# Altium PCB DC721E V1.0.PcbDoc (part 1 of 2)
Units mm, origin at the board's own origin, x right, y up, seen from the top; angles counter-clockwise.
Board outline 110.72 x 218.65 mm, 2 copper layers (Top Layer, Bottom Layer); 126 components, 58 nets, 282 pads, 418 vias.
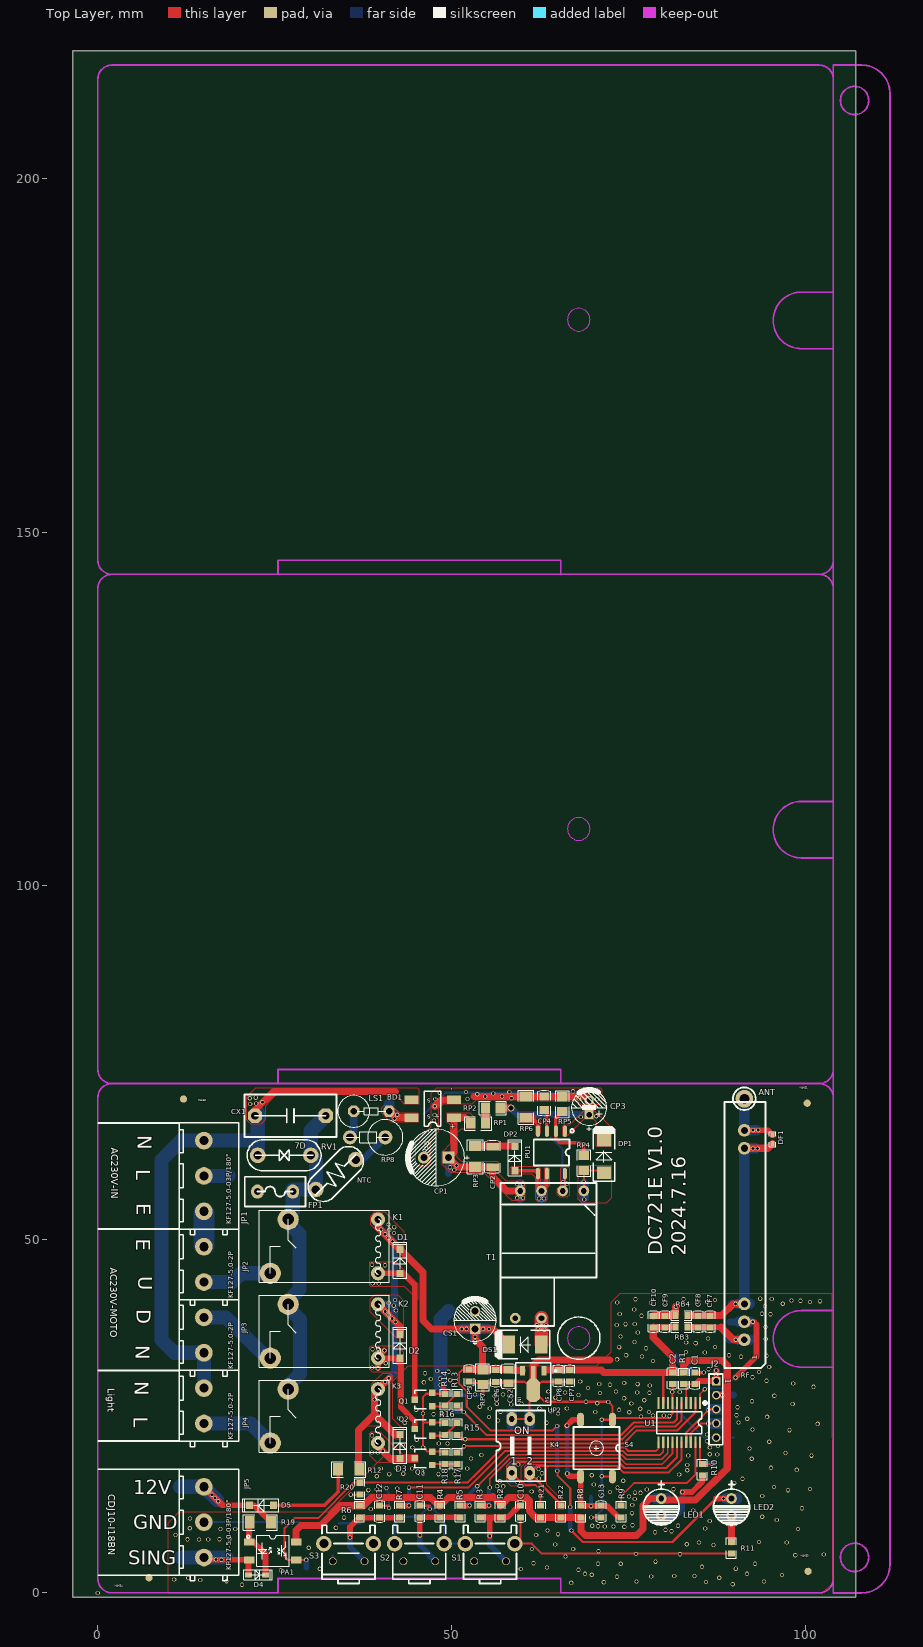
[diagram p0: Top Layer view]
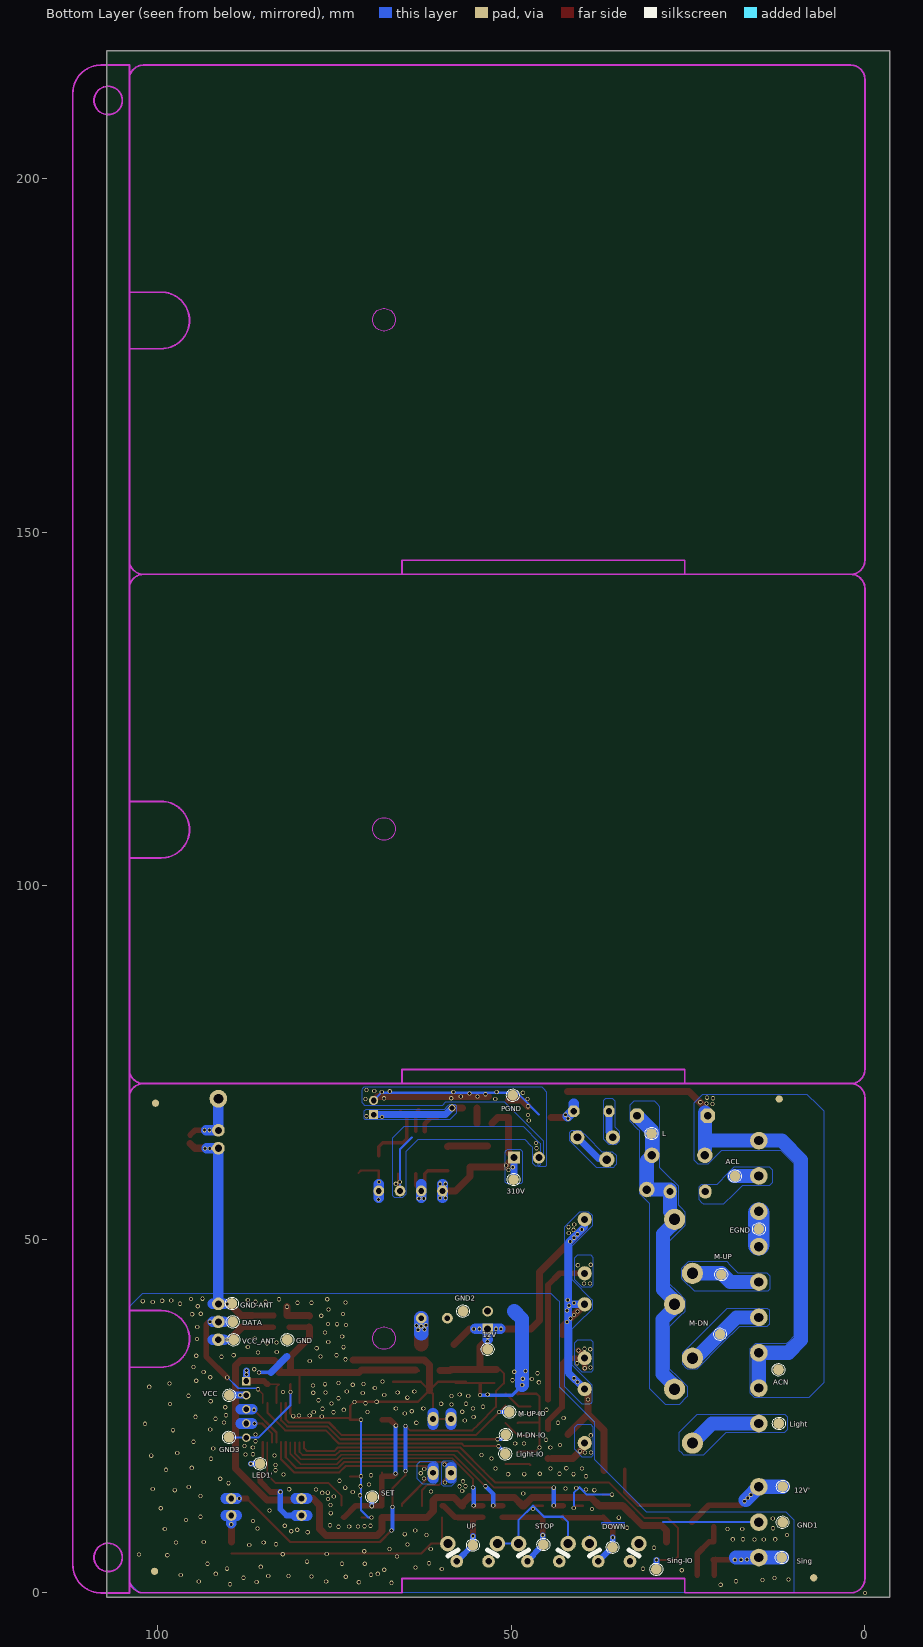
[diagram p1: Bottom Layer view, seen from below]

## Layer stack, top to bottom
Top Solder: solder mask 0.0102, Solder Resist, Dk 3.5
Top Layer: signal copper 0.0356
Dielectric1: core 0.32, FR-4, Dk 4.8
Bottom Layer: signal copper 0.0356
Bottom Solder: solder mask 0.0102, Solder Resist, Dk 3.5

## Board outline
-3.538,-0.61 107.181,-0.61 107.181,218.044 -3.538,218.044

## Design rules (kind name [scope] priority, off if disabled: settings)
AssemblyTestPointUsage [All] p0: scope1count=1 scope1_0_kind=Board scope1_0_value=Board scope2count=1 scope2_0_kind=Board scope2_0_value=Board commentlength=0
AssemblyTestpoint [All] p0: scope1count=1 scope1_0_kind=Board scope1_0_value=Board scope2count=1 scope2_0_kind=Board scope2_0_value=Board commentlength=0
Clearance [All] p0: scope1count=1 scope1_0_kind=Board scope1_0_value=Board scope2count=1 scope2_0_kind=Board scope2_0_value=Board commentlength=0 gap=0.2
Clearance POLY [All] p0: scope1count=1 scope1_0_kind=Board scope1_0_value=Board scope2count=1 scope2_0_kind=Board scope2_0_value=Board commentlength=0 gap=0.254
Clearance POLY [All] p1: gap=0.254 ignorepadtopadclearanceinfootprint=FALSE except(0: Arc-Hole Track-Hole SMDPad-Hole THPad-Hole Via-Hole Fill-Hole Poly-Hole Region-Hole Text-Hole)
Clearance [All] p2: gap=0.2 ignorepadtopadclearanceinfootprint=FALSE except(0: Arc-Hole Track-Hole SMDPad-Hole THPad-Hole Via-Hole Fill-Hole Poly-Hole Region-Hole Text-Hole)
ComponentClearance [All] p0: scope1count=1 scope1_0_kind=Board scope1_0_value=Board scope2count=1 scope2_0_kind=Board scope2_0_value=Board commentlength=0 gap=0.254 collisioncheckmode=3
DiffPairsRouting [All] p0: scope1count=1 scope1_0_kind=Board scope1_0_value=Board scope2count=1 scope2_0_kind=Board scope2_0_value=Board commentlength=0
FabricationTestPointUsage TestPointUsage [All] p0: scope1count=1 scope1_0_kind=Board scope1_0_value=Board scope2count=1 scope2_0_kind=Board scope2_0_value=Board commentlength=0 valid=0 allowmultiple=FALSE
FabricationTestPointUsage TestPointUsage [All] p1: valid=0 allowmultiple=FALSE
FabricationTestpoint Testpoint [All] p0: scope1count=1 scope1_0_kind=Board scope1_0_value=Board scope2count=1 scope2_0_kind=Board scope2_0_value=Board commentlength=0 side=3 testpointundercomponent=TRUE minsize=1.016 maxsize=2.54 preferedsize=1.524 minholesize=0 maxholesize=1.016 preferedholesize=0.813 testpointgrid=0.025
FabricationTestpoint Testpoint [All] p1: side=3 testpointundercomponent=TRUE minsize=1.016 maxsize=2.54 preferedsize=1.524 minholesize=0 maxholesize=1.016 preferedholesize=0.813 testpointgrid=0.025 allowsidetop=TRUE allowsidebottom=TRUE usegrid=TRUE gridtolerance=0
FanoutControl Fanout_BGA [All] p0 off: scope1count=1 scope1_0_kind=Board scope1_0_value=Board scope2count=1 scope2_0_kind=Board scope2_0_value=Board commentlength=69 // Protel DXP Scope 1 Expression Was: IsBGA   Fanout_BGA (Default Rule)
FanoutControl Fanout_LCC [All] p0 off: scope1count=1 scope1_0_kind=Board scope1_0_value=Board scope2count=1 scope2_0_kind=Board scope2_0_value=Board commentlength=69 // Protel DXP Scope 1 Expression Was: IsLCC   Fanout_LCC (Default Rule)
FanoutControl Fanout_SOIC [All] p0 off: scope1count=1 scope1_0_kind=Board scope1_0_value=Board scope2count=1 scope2_0_kind=Board scope2_0_value=Board commentlength=71 // Protel DXP Scope 1 Expression Was: IsSOIC   Fanout_SOIC (Default Rule)
FanoutControl Fanout_Small [All] p0 off: scope1count=1 scope1_0_kind=Board scope1_0_value=Board scope2count=1 scope2_0_kind=Board scope2_0_value=Board commentlength=84 // Protel DXP Scope 1 Expression Was: (CompPinCount < 5)   Fanout_Small (Default Rule)
FanoutControl Fanout_Default [All] p0: scope1count=1 scope1_0_kind=Board scope1_0_value=Board scope2count=1 scope2_0_kind=Board scope2_0_value=Board commentlength=30 // Fanout_Default (Default Rule)
FanoutControl Fanout_Small [All] p1 off: bgadir=Out bgaviamode=Centered fanoutstyle=Auto fanoutdirection=Alternating viagrid=0.025 // Protel DXP Scope 1 Expression Was: (CompPinCount < 5)   Fanout_Small (Default Rule)
FanoutControl Fanout_Default [All] p2: bgadir=Out bgaviamode=Centered fanoutstyle=Auto fanoutdirection=Alternating viagrid=0.025 // Fanout_Default (Default Rule)
FanoutControl Fanout_SOIC [All] p3 off: bgadir=Out bgaviamode=Centered fanoutstyle=Auto fanoutdirection=Alternating viagrid=0.025 // Protel DXP Scope 1 Expression Was: IsSOIC   Fanout_SOIC (Default Rule)
FanoutControl Fanout_BGA [All] p4 off: bgadir=Out bgaviamode=Centered fanoutstyle=Auto fanoutdirection=Alternating viagrid=0.025 // Protel DXP Scope 1 Expression Was: IsBGA   Fanout_BGA (Default Rule)
FanoutControl Fanout_LCC [All] p5 off: bgadir=Out bgaviamode=Centered fanoutstyle=Auto fanoutdirection=Alternating viagrid=0.025 // Protel DXP Scope 1 Expression Was: IsLCC   Fanout_LCC (Default Rule)
Height [All] p0: scope1count=1 scope1_0_kind=Board scope1_0_value=Board scope2count=1 scope2_0_kind=Board scope2_0_value=Board commentlength=0
HoleSize [All] p0: scope1count=1 scope1_0_kind=Board scope1_0_value=Board scope2count=1 scope2_0_kind=Board scope2_0_value=Board commentlength=0 absolutevalues=TRUE maxlimit=2.54 minlimit=0.025 maxpercent=80.000 minpercent=20.000
HoleToHoleClearance [All] p0: scope1count=1 scope1_0_kind=Board scope1_0_value=Board scope2count=1 scope2_0_kind=Board scope2_0_value=Board commentlength=0
LayerPairs [All] p0: scope1count=1 scope1_0_kind=Board scope1_0_value=Board scope2count=1 scope2_0_kind=Board scope2_0_value=Board commentlength=0 enforce=TRUE
MinimumSolderMaskSliver [All] p0: scope1count=1 scope1_0_kind=Board scope1_0_value=Board scope2count=1 scope2_0_kind=Board scope2_0_value=Board commentlength=0
NetAntennae [All] p0: scope1count=1 scope1_0_kind=Board scope1_0_value=Board scope2count=1 scope2_0_kind=Board scope2_0_value=Board commentlength=0
PasteMaskExpansion [All] p0: scope1count=1 scope1_0_kind=Board scope1_0_value=Board scope2count=1 scope2_0_kind=Board scope2_0_value=Board commentlength=0 expansion=0
PlaneClearance [All] p0: scope1count=1 scope1_0_kind=Board scope1_0_value=Board scope2count=1 scope2_0_kind=Board scope2_0_value=Board commentlength=0 clearance=0.508
PlaneConnect [All] p0: scope1count=1 scope1_0_kind=Board scope1_0_value=Board scope2count=1 scope2_0_kind=Board scope2_0_value=Board commentlength=0 planeconnectstyle=Direct reliefexpansion=0.508 reliefentries=4 reliefconductorwidth=0.254 reliefairgap=0.254
PlaneConnect [All] p1: planeconnectstyle=Direct reliefexpansion=0.508 reliefentries=4 reliefconductorwidth=0.254 reliefairgap=0.254
PolygonConnect PolygonConnect_1 [All] p0: scope1count=1 scope1_0_kind=Board scope1_0_value=Board scope2count=1 scope2_0_kind=Board scope2_0_value=Board commentlength=0 connectstyle=Direct reliefconductorwidth=0.5 reliefentries=4 polygonreliefangle="90 Angle"
PolygonConnect [All] p0 off: scope1count=1 scope1_0_kind=Board scope1_0_value=Board scope2count=1 scope2_0_kind=Board scope2_0_value=Board commentlength=44 connectstyle=Relief reliefconductorwidth=0.5 reliefentries=4 polygonreliefangle="90 Angle" // Protel DXP Scope 2 Expression Was: isvia
PolygonConnect PolygonConnect_1 [All] p1: connectstyle=Direct reliefconductorwidth=0.5 reliefentries=4 polygonreliefangle="90 Angle" airgapwidth=0.254
PolygonConnect [All vs isvia] p2: connectstyle=Relief reliefconductorwidth=0.5 reliefentries=4 polygonreliefangle="90 Angle" airgapwidth=0.254
RoutingCorners [All] p0: scope1count=1 scope1_0_kind=Board scope1_0_value=Board scope2count=1 scope2_0_kind=Board scope2_0_value=Board commentlength=0 cornerstyle=45-Degree minsetback=2.54 maxsetback=2.54
RoutingLayers [All] p0: scope1count=1 scope1_0_kind=Board scope1_0_value=Board scope2count=1 scope2_0_kind=Board scope2_0_value=Board commentlength=0 top layer=Horizontal bottom layer=Vertical
RoutingPriority [All] p0: scope1count=1 scope1_0_kind=Board scope1_0_value=Board scope2count=1 scope2_0_kind=Board scope2_0_value=Board commentlength=0
RoutingTopology [All] p0: scope1count=1 scope1_0_kind=Board scope1_0_value=Board scope2count=1 scope2_0_kind=Board scope2_0_value=Board commentlength=0 topology=Shortest
RoutingVias [All] p0: scope1count=1 scope1_0_kind=Board scope1_0_value=Board scope2count=1 scope2_0_kind=Board scope2_0_value=Board commentlength=0 holewidth=0.406 width=0.584 viastyle="Through Hole" minholewidth=0.254 minwidth=0.254 maxholewidth=0.711 maxwidth=1.27
RoutingVias [All] p1: holewidth=0.406 width=0.584 viastyle="Through Hole" minholewidth=0.254 minwidth=0.254 maxholewidth=0.711 maxwidth=1.27
ShortCircuit [All] p0: scope1count=1 scope1_0_kind=Board scope1_0_value=Board scope2count=1 scope2_0_kind=Board scope2_0_value=Board commentlength=0 allowed=FALSE
SilkToBoardRegionClearance [All] p0: scope1count=1 scope1_0_kind=Board scope1_0_value=Board scope2count=1 scope2_0_kind=Board scope2_0_value=Board commentlength=0
SilkToSilkClearance [All] p0: scope1count=1 scope1_0_kind=Board scope1_0_value=Board scope2count=1 scope2_0_kind=Board scope2_0_value=Board commentlength=0
SilkToSolderMaskClearance SilkscreenOverComponentPads [All] p0 off: scope1count=1 scope1_0_kind=Board scope1_0_value=Board scope2count=1 scope2_0_kind=Board scope2_0_value=Board commentlength=44 // Protel DXP Scope 1 Expression Was: IsPad
SilkToSolderMaskClearance SilkscreenOverComponentPads [IsPad] p1: minsilkscreentomaskgap=0.254 clearancetoexposedcopper=TRUE
SolderMaskExpansion [All] p0: scope1count=1 scope1_0_kind=Board scope1_0_value=Board scope2count=1 scope2_0_kind=Board scope2_0_value=Board commentlength=0 expansion=0.102
SolderMaskExpansion [All] p1: expansion=0.102 istentingtop=FALSE
UnRoutedNet [All] p0: scope1count=1 scope1_0_kind=Board scope1_0_value=Board scope2count=1 scope2_0_kind=Board scope2_0_value=Board commentlength=0
UnpouredPolygon [All] p0: scope1count=1 scope1_0_kind=Board scope1_0_value=Board scope2count=1 scope2_0_kind=Board scope2_0_value=Board commentlength=0
Width [All] p0: scope1count=1 scope1_0_kind=Board scope1_0_value=Board scope2count=1 scope2_0_kind=Board scope2_0_value=Board commentlength=0 maxlimit=10 minlimit=0.254 preferedwidth=0.254
Width [All] p1: maxlimit=10 minlimit=0.254 preferedwidth=0.254
21 further rules are at their usual default settings.

## Components (designator, comment, footprint, x,y, rotation, side; value= is the part's Value field where it differs from the comment)
12V "TEST_POINT" 测试点 53.34,34.442 r180 bottom
12V' "TEST_POINT" 测试点 11.608,15.037 r270 bottom
310V "TEST_POINT" 测试点 49.682,58.445 r270 bottom
ACL "TEST_POINT" 测试点 18.364,58.928 r270 bottom
ACN "TEST_POINT" 测试点 12.217,31.547 r270 bottom
ANT "天线" 天线焊盘 91.415,69.875 r0 top
BD1 "MB6S" 整流桥MB6S 47.371,68.453 r180 top
C1 "0.1uF" C0603 84.43,30.328 r90 top
C2 "0.1uF" C0603 81.229,30.328 r90 top
C10 "10nF" C0603 59.781,11.5 r270 top
C11 "10nF" C0603 45.55,11.5 r90 top
C12 "10nF" C0603 39.858,11.5 r90 top
C13 "10nF" C0603 71.165,11.5 r270 top
CF7 "10nF" C0603 86.589,38.354 r90 top
CF8 "0.1uF" C0603 84.887,38.354 r90 top
CF9 "10nF" C0603 80.188,38.354 r90 top
CF10 "0.1uF" C0603 78.537,38.354 r90 top
CP1 "4.7uF/450V" RB8 47.854,61.544 r180 top
CP2 "1000V-1nF" C1206 55.829,61.646 r90 top
CP3 "50V-4.7uF" RB5 69.469,68.631 r90 top
CP4 "0805-50V-22nF" C0805 63.119,69.24 r90 top
CP5 "4.7uF 16V" C0603 52.502,30.734 r270 top
CP6 "0.1uF" C0603 56.261,30.658 r270 top
CP7 "0.1uF" C0603 66.726,30.683 r270 top
CP8 "22uF" C0603 65.1,30.683 r270 top
CS1 "100uF/35V" RB6-2.5MM 53.34,38.583 r90 top
CS2 "0805-0.1uF" C0805 58.09,30.607 r270 top
CX1 "X2 0.22uF" "电容X2  220nF/275V  13*6 P=10" 27.229,67.462 r180 top
D1 "1N4007W" SOD-123FL(A7) 42.748,46.888 r90 top
D2 "1N4007W" SOD-123FL(A7) 42.748,34.874 r90 top
D3 "1N4007W" SOD-123FL(A7) 42.748,20.726 r90 top
D4 "1N4148" SOD323 22.504,2.54 r180 top
D5 "1N4007W" SOD-123FL(A7) 23.165,12.395 r180 top
DATA "TEST_POINT" 测试点 89.383,38.329 r270 bottom
DF1 "ESD112-B1-02EL" R0402 95.402,64.135 r90 top
DOWN "TEST_POINT" 测试点 35.687,6.452 r270 bottom
DP1 "RS1M" SMA 71.577,61.697 r90 top
DP2 "1N4007W" SOD-123FL(A7) 58.979,61.392 r90 top
DS1 "SK310B" SMB 60.401,35.128 r180 top
EGND "TEST_POINT" 测试点 14.986,51.46 r270 bottom
FP1 "T10A 250V" 保险丝-方形,8*4mm 25.07,56.744 r0 top
GND "TEST_POINT" 测试点 81.661,35.789 r270 bottom
GND1 "TEST_POINT" 测试点 11.633,9.982 r270 bottom
GND2 "TEST_POINT" 测试点 56.82,39.833 r270 bottom
GND3 "TEST_POINT" 测试点 89.916,21.996 r270 bottom
GND-ANT "TEST_POINT" 测试点 89.51,40.919 r270 bottom
J2 "烧录口" 调试烧录口2.0*5 87.452,25.959 r270 top
JP1 "KF127-5.0-03P-1G/180°" "接插件 KF127-5.0-03P-1G/180°" 15,58.952 r90 top
JP2 "HDR254MS-1X2-180°" "接插件 KF127-5.0-02P-1G/180°" 15,46.452 r90 top
JP3 "HDR254MS-1X2-180°" "接插件 KF127-5.0-02P-1G/180°" 15,36.452 r90 top
JP4 "HDR254MS-1X2-180°" "接插件 KF127-5.0-02P-1G/180°" 15,26.452 r90 top
JP5 "KF127-5.0-03P-1G/180°" "接插件 KF127-5.0-03P-1G/180°" 15,10 r90 top
K1 "HF32F/012-HSLQ" 继电器HF32FA-G/H 32,49 r180 top
K2 "HF32F/012-HSLQ" 继电器HF32FA-G/H 32,37 r180 top
K3 "HF32F/012-HSLQ" 继电器HF32FA-G/H 32,25 r180 top
K4 "KF-1001-02" "拨码开关 KF-1001-02" 59.792,20.777 r0 top
L "TEST_POINT" 测试点 30.175,64.948 r270 bottom
LED1 "@3-绿色" LED,3mm 79.664,12.141 r270 top
LED1' "TEST_POINT" 测试点 85.522,18.263 r270 bottom
LED2 "@3-红色" LED,3mm 89.6,12.141 r270 top
Light "TEST_POINT" 测试点 12.167,23.952 r270 bottom
Light-IO "TEST_POINT" 测试点 50.851,19.66 r270 bottom
LS1 "色码电感 0510-102KT 1mH 1W" 电阻1W立式 38.684,68.097 r0 top
M-DN "TEST_POINT" 测试点 20.472,36.576 r270 bottom
M-DN-IO "TEST_POINT" 测试点 50.775,22.377 r270 bottom
M-UP "TEST_POINT" 测试点 20.32,45.009 r270 bottom
M-UP-IO "TEST_POINT" 测试点 50.292,25.578 r270 bottom
MAKE1 "" MK点 100.305,69.24 r90 top
MAKE2 "" MK点 12.116,69.825 r90 top
MAKE3 "" MK点 100.432,3.048 r90 top
MAKE4 "" MK点 7.239,2.134 r90 top
NTC "热敏电阻 NTC-5D09" 电阻热敏NTC5D09 33.655,59.157 r45 top
PA1 "EL357N" 光藉P181 24.74,5.944 r0 top
PGND "TEST_POINT" 测试点 49.784,70.358 r270 bottom
PU1 "ME8321" SOP-7 64.135,62.281 r270 top
Q1 "8050" SOT-23-8050 46.05,27.33 r90 top
Q2 "8050" SOT-23-8050 46.05,23.177 r90 top
Q3 "8050" SOT-23-8050 46.05,19.025 r90 top
R1 "10K" R0603 82.818,30.328 r270 top
R2 "47K" R0603 56.923,11.5 r270 top
R3 "2K" R0603 54.077,11.5 r270 top
R4 "47K" R0603 48.385,11.5 r270 top
R5 "2K" R0603 51.231,11.5 r270 top
R6 "47K" R0603 37,11.5 r270 top
R7 "2K" R0603 42.692,11.5 r270 top
R8 "47K" R0603 68.308,11.5 r90 top
R9 "2K" R0603 74,11.5 r270 top
R10 "2K" R0603 85.471,17.424 r90 top
R11 "10K" R0603 89.586,6.375 r270 top
R12 "1206-100R" R1206 35.484,17.475 r180 top
R13 "2K" R0603 50.8,27.33 r270 top
R14 "47K" R0603 49.098,27.33 r90 top
R15 "2K" R0603 50.8,23.177 r270 top
R16 "47K" R0603 49.098,23.177 r90 top
R17 "2K" R0603 50.8,19.025 r90 top
R18 "47K" R0603 49.098,19.025 r90 top
R19 "10K" R1206 22.987,9.982 r0 top
R20 "47K" R0603 37.059,14.707 r270 top
R21 "47K" R0603 62.615,11.5 r90 top
R22 "47K" R0603 65.462,11.5 r270 top
RB3 "0603-80R/100MHz" R0603 82.525,37.567 r0 top
RB4 "0603-80R/100MHz" R0603 82.525,39.218 r0 top
RF "HT1270-RF 3.3V 433MHz A/04" 接收模块 91.415,35.789 r270 top
RP1 "0805-1.8M" R0805 53.772,66.396 r180 top
RP2 "0805-1.8M" R0805 55.855,68.555 r180 top
RP3 "1206-150K" R1206 53.365,61.697 r270 top
RP4 "0805-24K" R0805 68.732,60.782 r270 top
RP5 "0805-3.3K" R0805 65.684,69.113 r270 top
RP6 "1206-4.3R" R1206 60.528,68.682 r270 top
RP7 "0805-3.3K" R0805 54.407,30.505 r90 top
RP8 "0.39R 5% 2WS" 电阻2W立式 38.151,64.414 r180 top
RV1 "JVR10N511K87PRM" "电阻压敏 P=7.5 RI" 26.365,61.874 r0 top
S1 "TSZJ6643" 按键TSZJ6643(DC43盒) 55.46,5.617 r0 top
S2 "TSZJ6643" 按键TSZJ6643(DC43盒) 45.46,5.617 r0 top
S3 "TSZJ6643" 按键TSZJ6643(DC43盒) 35.46,5.617 r0 top
S4 "TSTP6650K" "按键 TSTP6650" 70.51,20.472 r270 top
SET "TEST_POINT" 测试点 69.672,13.564 r270 bottom
Sing "TEST_POINT" 测试点 11.76,5.004 r270 bottom
Sing-IO "TEST_POINT" 测试点 29.489,3.327 r0 bottom
STOP "TEST_POINT" 测试点 45.466,6.833 r270 bottom
T1 "DC1140-T" "变压器EPC13 加宽" 59.03,38.837 r270 top
U1 "HC32F002C4P" TSSOP20-0.65 82.22,24.079 r270 top
UP "TEST_POINT" 测试点 55.423,6.754 r180 bottom
UP2 "LR78L05U" 78L05 61.57,31.191 r180 top
VCC "TEST_POINT" 测试点 89.865,27.94 r270 bottom
VCC_ANT "TEST_POINT" 测试点 89.256,35.789 r270 bottom

## Footprints (in the part's own frame and the unit in brackets; to place one, negate y for a bottom-side part, rotate by r counter-clockwise, add the part's x,y. Pads: shape width x height; smd on the part's side, far side on the other; paste and mask are expansions set on the pad)
78L05 [mm]
  rect 0.7x1.35 smd: 1(1.5,-0.225) 3(-1.5,-0.225)
  oct 1.9x3.3 smd: 2(0,2.55)
  rect 0.7x1.8 smd: 2(0,0)
  silkscreen extent -3.28,-1.35 2.5,4.65
C0603 [mm]
  rect 0.85x1 smd: 1(-0.825,0) 2(0.825,0)
  silkscreen extent -1.5,-0.7 1.5,0.7
C0805 [mm]
  rect 1.1x1.4 smd: 1(-0.95,0) 2(0.95,0)
  silkscreen extent -1.75,-0.95 1.75,0.95
C1206 [mm]
  rect 1.1x1.8 smd: 1(-1.45,0) 2(1.45,0)
  silkscreen extent -2.3,-1.1 2.3,1.1
LED,3mm [mm]
  round 1.524 hole 0.8: 1(-1.2,0) 2(1.2,0)
  silkscreen extent -3.69,-2.55 2.55,2.55
MK点 [mil]
  round 40 smd: ""(0,0)
  round 40 smd far side: ""(0,0)
R0402 [mm]
  rect 0.7x0.6 smd: 1(-0.6,0) 2(0.6,0)
  silkscreen extent -1.05,-0.45 1.05,0.45
R0603 [mm]
  rect 0.85x1 smd: 1(-0.825,0) 2(0.825,0)
  silkscreen extent -1.45,-0.7 1.45,0.7
R0805 [mm]
  rect 1.3x1.5 smd: 1(-1.05,0) 2(1.05,0)
  silkscreen extent -1.9,-0.95 1.9,0.95
R1206 [mm]
  rect 1.4x1.8 smd: 1(-1.5,0) 2(1.5,0)
  silkscreen extent -2.4,-1.1 2.4,1.1
RB5 [mm]
  rect 1.3x1.3 hole 0.8: 1(-1,0)
  round 1.3 hole 0.8: 2(1,0)
  silkscreen extent -3.3,-2.5 2.5,2.5
RB6-2.5MM [mm]
  rect 1.5x1.5 hole 1: 1(-1.25,0)
  round 1.5 hole 1: 2(1.25,0)
  silkscreen extent -3.51,-3 3,3
RB8 [mm]
  rect 1.7x1.7 hole 1: 1(-1.75,0)
  round 1.7 hole 1: 2(1.75,0)
  silkscreen extent -4.65,-4 4,4
SMA [mm]
  rect 1.8x2 smd: 1(-2.3,0) 2(2.3,0)
  silkscreen extent -3.5,-1.5 4.19,1.5
SMB [mm]
  rect 1.8x2.5 smd: 1(-2.3,0) 2(2.3,0)
  silkscreen extent -3.5,-2 4.19,2
SOD323 [mm]
  rect 1x0.7 smd: 1(1.2,0) 2(-1.2,0)
  silkscreen extent -2.16,-0.7 1.91,0.7
SOD-123FL(A7) [mm]
  rect 1x1 smd: 1(-1.7,0) 2(1.7,0)
  silkscreen extent -2.4,-0.95 2.7,0.95
SOP-7 [mm]
  oval 1.598x0.6 smd: 1(-3,1.905) 2(-3,0.635) 3(-3,-0.635) 4(-3,-1.905) 5(3,-1.905) 6(3,-0.635) 8(3,1.905)
  silkscreen extent -3.3,-2.5 1.85,3.17
SOT-23-8050 [mm]
  rect 0.9x0.95 smd: 1(0,1.25) 2(0.95,-1.25) 3(-0.95,-1.25)
  silkscreen extent -1.3,-0.38 1.3,1.25
TSSOP20-0.65 [mm]
  rect 1.65x0.3 smd: 1(-2.775,2.925) 2(-2.775,2.275) 3(-2.775,1.625) 4(-2.775,0.975) 5(-2.775,0.325) 6(-2.775,-0.325) 7(-2.775,-0.975) 8(-2.775,-1.625) 9(-2.775,-2.275) 10(-2.775,-2.925) 11(2.775,-2.925) 12(2.775,-2.275) 13(2.775,-1.625) 14(2.775,-0.975) 15(2.775,-0.325) 16(2.775,0.325) 17(2.775,0.975) 18(2.775,1.625) 19(2.775,2.275) 20(2.775,2.925)
  silkscreen extent -2.97,-3.2 1.55,3.82
保险丝-方形,8*4mm [mm]
  oval 1.8x2 hole 1: 1(-2.5,0) 2(2.5,0)
  silkscreen extent -4.3,-2.1 4.3,2.1
光藉P181 [mm]
  rect 1.5x1 smd: 1(-3.3,1.27) 2(-3.3,-1.27) 3(3.3,-1.27) 4(3.3,1.27)
  silkscreen extent -3.65,-2.2 2.3,2.21
"变压器EPC13 加宽" [mm]
  round 1.524 hole 0.8: 1(-18,9.7) 2(-18,6.7) 3(-18,3.7) 4(-18,0.7) 5(0,0) 6(0,3.7)
  silkscreen extent -19.1,-2.12 1.14,11.5
天线焊盘 [mm]
  round 2.5 hole 1.4: 1(0,0)
  silkscreen extent -1.6,-1.6 1.6,1.6
"拨码开关 KF-1001-02" [mm]
  oct 1.5x2 hole 0.8: 1(-1.27,-3.81)
  oval 1.5x2 hole 0.8: 2(1.27,-3.81) 3(1.27,3.81) 4(-1.27,3.81)
  silkscreen extent -3.46,-5 3.46,5
"按键 TSTP6650" [mm]
  oval 2x1 smd: 1(-4,2.25) 2(-4,-2.25) 3(4,-2.25) 4(4,2.25)
  silkscreen extent -3,-3.25 3,3.25
按键TSZJ6643(DC43盒) [mm]
  round 2.2 hole 1.3: 1(-3.5,1.35) 2(3.5,1.35)
  round 1.1 / inner round 1.8 / far side round 1.8 hole 0.9: 3(2.25,-1.15) 4(-2.25,-1.15)
  silkscreen extent -3.75,-4.3 3.75,3.95
"接插件 KF127-5.0-02P-1G/180°" [mm]
  round 2.5 hole 1.3: 1(-2.5,0) 2(2.5,0)
  silkscreen extent -5.8,-4.9 5,3.5
"接插件 KF127-5.0-03P-1G/180°" [mm]
  round 2.5 hole 1.3: 1(-5,0) 2(0,0) 3(5,0)
  silkscreen extent -8.3,-4.9 7.5,3.5
接收模块 [mm]
  round 1.8 hole 0.9: 1(0,0)
  round 1.8 hole 1: 2(-2.54,0) 3(-5.08,0) 4(-27.08,0) 5(-29.62,0)
  silkscreen extent -33.62,-2.8 4,3
整流桥MB6S [mm]
  rect 2x1.2 smd: 1(-3,1.25) 2(-3,-1.25) 3(3,1.25) 4(3,-1.25)
  silkscreen extent -1.14,-2.49 1.19,2.51
测试点 [mm]
  round 1.5 smd: 1(0,0)
  silkscreen extent -0.9,-0.9 0.9,0.9
"电容X2  220nF/275V  13*6 P=10" [mm]
  oct 2x2 hole 1.1: 1(-5,0) 2(5,0)
  silkscreen extent -6.5,-3 6.5,3
电阻1W立式 [mm]
  oct 1.6x1.6 hole 0.9: 1(-2.5,0) 2(2.5,0)
  silkscreen extent -4.75,-2.25 2,2.25
电阻2W立式 [mm]
  round 2 hole 1.1: 1(-2.5,0) 2(2.5,0)
  silkscreen extent -5,-2.5 3,2.5
"电阻压敏 P=7.5 RI" [mm]
  round 2.2 hole 1.2: 1(3.75,0) 2(-3.75,0)
  silkscreen extent -5.24,-2.2 5.2,2.2
电阻热敏NTC5D09 [mm]
  round 2.2 hole 1.2: 1(-3.5,0.5) 2(3.499,-0.5)
  silkscreen extent -4.59,-2 4.69,2.1
继电器HF32FA-G/H [mm]
  round 3 hole 1.6: 1(7.62,3.81) 2(5.08,-3.81)
  round 2 hole 1: 3(-7.62,-3.81) 4(-7.62,3.81)
  silkscreen extent -9.2,-5.1 9.2,5.1
调试烧录口2.0*5 [mm]
  rect 1.2x1.2 hole 0.8: 1(-4,0)
  round 1.2 hole 0.8: 2(-2,0) 3(0,0) 4(2,0) 5(4,0)
  silkscreen extent -5,-1.04 5.01,0.9

## Part data
12V ANT DATA GND-ANT MAKE1 MAKE2 MAKE3 MAKE4 VCC: library part Antenna, "Generic Antenna"
C1 C2 C10 C11 C12 C13 CF7 CF8 CF9 CF10 CP2 CP4 CP5 CP6 CP7 CP8 CS2 CX1: library part CAP, "Capacitor"
CP1 CP3 CS1: library part ELECTRO1, "Electrolytic Capacitor"
D1 D3 D4 D5 DP1 DP2 DS1: library part DIODE, "Diode"
D2: library part 二极管
DF1: library part TVS_PESDNC3D5VB, "TVS管 PESDNC3D5VU/SOD-323"
FP1: library part "Fuse 2", "Fuse"
J2: library part "Header 5", "Header, 5-Pin"
JP1 JP5: library part "Header 3", "Header, 3-Pin"
JP2 JP3 JP4: "接插件 1*2/2.5mm/180"
K1 K2 K3: library part Relay-SPST, "Single-Pole Single-Throw Relay"
K4: library part 拨码开关-2P
LED1 LED2: library part LED2, "Typical RED, GREEN, YELLOW, AMBER GaAs LED"
LS1: library part Inductor, "Inductor"
NTC RV1: library part VARISTOR
PA1: library part Optoisolator1, "4-Pin Phototransistor Optocoupler"
R1 R2 R3 R4 R5 R6 R7 R8 R9 R10 R11 R12 R13 R14 R15 R16 R17 R18 R19 R20 R21 R22 RB3 RB4 RP1 RP2 RP3 RP4 RP5 RP6 RP7 RP8: library part 电阻
RF: library part WIRELESS_RM
S1 S2 S3 S4: library part "按键 4脚"
T1: library part 变压器3绕组6脚
U1: library part "华大HC32L110 C6PA 20TSSOP"
UP2: library part 78L05

## Via types
v1: diameter 0.6, hole 0.4, Top Layer to Bottom Layer, tented both sides, 417 vias
v2: diameter 1, hole 0.7, Top Layer to Bottom Layer, tented both sides, 1 vias

## Nets (pads, with @x,y where several pads share a name; then routed paths per layer and width w, separated by ;. In a path a pad name is that pad's centre, name@x,y a point inside that pad or via, vN(x,y) a via of type N, cw(c..) or ccw(c..) an arc to the next point about the centre after c; other vN are vias at no path point)
12V: 12V'.1 D5.2 JP5.3 R19.2 | length 17.5
  Top Layer w0.8: 17.42,12.58 17.605,12.395 D5.2@21.465,12.395 22.074,12.395 R19.2@24.487,9.982
  Top Layer w1: JP5.3@15,15 v1(16.574,13.426) 17.42,12.58
  Bottom Layer w2: 12V'.1@11.645,15 JP5.3@15,15 v1(16.574,13.426) v1@16.843,13.157
  other v1: 17.033,12.967 16.128,13.872
12V/250MA: 12V.1 CP5.1 CP6.1 CS1.1 CS2.1 D1.2 D2.2 D3.2 DS1.2 K1.3 K2.3 K3.3 LED2.1 R12.1 RP7.2 UP2.1 | length 169
  Top Layer w0.3: CP5.1@52.095,31.559 51.574,31.559 51.054,31.039 51.054,29.642 52.172,28.524 52.172,26.314 54.686,23.8 ; 54.441,24.045 54.686,23.8 ; v1(64.948,23.597) 64.338,22.987 55.499,22.987 54.686,23.8 ; v1(64.973,17.221) 64.973,16.612 66.802,14.783 v1(66.802,12.141) ; v1(66.954,8.814) 68.57,7.199 81.265,7.199 87.408,13.341
  Top Layer w0.8: 87.408,13.341 LED2.1@89.6,13.341
  Top Layer w1: R12.1@36.881,17.296 36.881,23.005 39.144,25.269 ; K3.3@39.144,28.81 v1(39.144,27.356) 39.144,25.269 ; K1.3@39.144,52.81 K1.3@39.62,52.334 ; K3.3@39.62,28.81 v1(41.148,30.338) ; K2.3@39.62,40.81 42.748,37.682 D2.2@42.748,36.574 ; K1.3@39.62,52.81 K1.3@39.62,52.334 ; 41.986,22.426 39.144,25.269 ; 48.489,37.338 50.47,37.336 ; CP5.1@52.095,31.559 RP7.2@54.417,31.559 ; DS1.2@58.101,35.128 55.897,37.333 v1(54.483,37.333) CS1.1@53.34,37.333 ; UP2.1@60.07,31.416 58.674,31.416 58.531,31.559 RP7.2@54.417,31.559 ; K1.3@39.62,52.334 39.62,51.717 D1.2@42.748,48.588 45.999,45.337 45.999,38.532 47.195,37.336 50.47,37.336 ; 50.47,37.336 v1(51.455,37.333) v1(52.146,37.333) CS1.1@53.34,37.333 ; CS1.1@53.34,37.333 v1(53.34,36.22) 53.34,35.89 54.417,34.813 RP7.2@54.417,31.559
  Bottom Layer w0.3: v1(64.948,23.597) v1@64.973,23.571
  Bottom Layer w0.6: v1(64.973,17.221) v1@64.973,23.571 ; v1(66.802,12.141) 66.802,8.966 v1(66.954,8.814)
  Bottom Layer w1: K3.3@39.62,28.81 41.935,31.125 v1@41.935,40.818 ; K2.3@39.62,40.81 41.928,40.81 v1@41.935,40.818 ; K1.3@39.62,52.81 39.62,51.82 41.935,49.505 v1@41.935,40.818
  Bottom Layer w1.5: v1@51.557,37.333 v1(52.146,37.333) CS1.1@53.34,37.333 ; v1@53.34,35.839 v1(53.34,36.22) CS1.1@53.34,37.333 ; v1@55.062,37.333 v1(54.483,37.333) CS1.1@53.34,37.333 ; 88.827,13.341 90.387,13.341
  other v1: 88.468,13.36 40.621,29.811 53.365,35.56 55.296,37.313 42.109,38.321 41.62,38.81 41.142,39.288 40.64,39.79 42.139,39.929 41.834,40.615 41.148,40.996 42.012,41.427 41.664,49.672 41.123,50.213 40.625,50.712 41.885,50.902 41.199,51.333 40.03,51.384 41.91,51.714 41.097,52.095
ACL: ACL.1 FP1.1 JP1.2 | length 3.5
  Bottom Layer w2: JP1.2@15,58.952 ACL.1@18.467,58.952
ACN: ACN.1 BD1.4 CX1.2 JP1.3 JP3.1 JP4.2 RV1.2 | length 78.1
  Top Layer w1: CX1.2@22.229,68.275 24.87,70.917 42.062,70.917
  Bottom Layer w2: JP4.2@15,28.952 JP3.1@15,33.952 10.828,33.952 9.017,35.763 9.017,61.214 11.755,63.952 JP1.3@15,63.952 22.508,63.952 22.615,64.059 ; RV1.2@22.615,62.687 22.615,64.059 ; CX1.2@22.615,67.889 22.615,64.059
  other v1: 21.539,69.113 22.403,69.215 23.266,69.367 21.488,69.952 22.327,70.028
DATA: DATA.1 RF.2 U1.1 | length 21.5
  Top Layer w0.254: U1.1@85.145,26.854 85.145,28.122 v1(85.827,28.804)
  Top Layer w0.8: v1(90.17,30.455) 93.142,33.426 93.142,37.948 92.761,38.329 RF.2@91.415,38.329
  Bottom Layer w0.254: v1(85.827,28.804) 85.963,28.94 88.604,28.94 90.119,30.455 v1(90.17,30.455)
  Bottom Layer w1: DATA.1@89.383,38.329 RF.2@91.415,38.329
  Bottom Layer w1.5: RF.2@90.627,38.329 RF.2@92.188,38.329
  other v1: 92.608,38.329
DOWN: R7.1 U1.12 | length 43.7
  Top Layer w0.254: v1@43.973,12.325 v1(43.993,12.344) ; v1(43.993,14.884) 52.393,14.884 57.556,20.048 74.273,20.048 74.812,19.51 79.515,19.51 79.945,19.94 U1.12@79.945,21.304
  Top Layer w0.8: R7.1@42.692,12.325 v1@43.973,12.325
  Bottom Layer w0.6: v1(43.993,12.344) v1(43.993,14.884)
EGND: EGND.1 JP1.1 JP2.2 | length 4.5
  Bottom Layer w3: JP2.2@15,49.206 JP1.1@15,53.696
GND: C1.2 C2.1 C10.2 C11.2 C12.2 C13.2 CF9.2 CF10.2 CP5.2 CP6.2 CP7.2 CP8.2 CS1.2 CS2.2 GND1.1 GND2.1 GND3.1 GND.1 J2.5 JP5.2 K4.3 K4.4 Q1.2 Q2.2 Q3.2 R11.2 R14.2 R16.2 R18.2 R20.2 RB4.1 RP7.1 S1.1 S1.2 S1.4 S2.1 S2.2 S2.4 S3.1 S3.2 S3.4 S4.1 S4.4 T1.5 U1.7 UP2.2 | length 233.6
  Top Layer w0.3: v1(35.763,13.894) 35.775,13.882 R20.2@37.059,13.882 ; C12.2@39.858,12.325 41.129,12.325 41.148,12.344 ; C11.2@45.55,12.325 46.92,12.325 46.939,12.344 ; R18.2@49.098,19.85 48.973,19.975 Q3.2@47.3,19.975 46.599,19.975 v1(45.999,20.574) 45.999,24.079 ; R16.2@49.098,24.002 49.021,24.079 45.999,24.079 ; R14.2@49.098,28.155 46.443,28.155 45.999,27.711 45.999,24.079 ; CP5.2@52.347,29.657 CS2.2@57.861,29.657 ; CP6.2@56.439,29.858 58.064,29.858 60.353,29.858 UP2.2@61.57,28.641 ; K4.4@58.522,24.587 K4.3@61.062,24.587 ; C10.2@59.781,10.675 59.781,7.788 S1.2@58.96,6.967 61.359,6.967 62.776,5.55 R11.2@89.586,5.55 ; K4.3@61.57,25.095 K4.3@61.062,24.587 ; CP7.2@66.726,29.858 CP8.2@65.1,29.858 62.787,29.858 UP2.2@61.57,28.641 ; v1(69.774,10.668) 69.781,10.675 C13.2@71.165,10.675 ; v1(71.247,16.485) 72.748,16.485 S4.4@72.76,16.472 ; v1(71.247,24.486) 72.747,24.486 S4.1@72.76,24.472 ; C2.1@81.229,29.503 81.245,29.487 U1.7@81.245,26.854 81.245,25.339 80.62,24.714 73.002,24.714 S4.1@72.76,24.472 ; K4.3@61.062,24.587 61.062,28.133 UP2.2@61.57,28.641 ; UP2.2@61.57,28.641 63.185,27.026 72.187,27.026 72.76,26.452 S4.1@72.76,24.472
  Top Layer w0.5: v1(48.463,29.388) 49.098,28.753 R14.2@49.098,28.155 ; v1(54.407,27.965) RP7.1@54.407,29.455 ; C1.2@84.43,31.153 85.661,31.153 v1(85.674,31.166)
  Top Layer w1: UP2.2@61.57,28.641 UP2.2@61.57,31.191 61.57,32.207 62.306,32.944 72.39,32.944 ; CF10.2@78.537,39.179 78.575,39.218 RB4.1@81.7,39.218 81.7,40.45 v1(81.712,40.462)
  Bottom Layer w0.3: JP5.2@15,10 28.514,10 ; S3.1@31.96,6.967 S3.1@31.96,7.728 ; S3.4@33.21,4.467 S3.4@33.21,5.304 ; 34.087,9.855 37.16,9.855 ; v1(35.763,13.894) 39.319,13.894 40.361,14.935 41.148,14.148 41.148,12.344 ; S3.2@38.96,6.967 S3.2@38.96,8.055 ; S2.1@41.96,6.967 41.96,10.007 42.723,10.77 45.364,10.77 46.939,12.344 48.96,10.324 S2.2@48.96,6.967 S1.1@51.96,6.967 S1.1@52.086,6.967 ; v1(69.774,10.668) 70.231,10.668 71.247,11.684 v1(71.247,16.485) v1(71.247,24.486) ; v1(81.229,28.397) 81.229,26.492 85.763,21.959 J2.5@87.452,21.959 89.878,21.959 GND3.1@89.916,21.996
  Bottom Layer w0.5: v1(48.463,29.388) 49.886,27.965 v1(54.407,27.965) ; 83.998,31.166 v1(85.674,31.166)
  Bottom Layer w1: 81.712,33.452 83.998,31.166
  Bottom Layer w1.5: K4.4@58.522,23.814 K4.4@58.522,25.375 ; K4.3@61.062,23.814 K4.3@61.062,25.375
  Bottom Layer w2: v1(48.463,29.388) 48.463,38.71 49.586,39.833
  other v1: 20.396,1.143 89.764,1.219 66.929,1.422 71.552,1.499 86.004,1.524 76.175,1.6 94.183,1.626 18.212,1.651 14.478,1.829 10.795,1.88 12.776,2.108 87.859,2.134 73.406,2.286 78.257,2.311 81.509,2.388 84.353,2.388 96.723,2.54 69.85,2.565 68.885,2.692 91.796,2.692 25.908,3.2 67.97,3.277 59.817,3.378 31.369,3.404 90.195,3.429 63.525,3.607 85.42,3.683 70.714,4.115 73.939,4.115 92.939,4.115 61.62,4.191 78.867,4.42 66.142,5.131 98.628,5.334 102.641,5.436 82.321,5.461 76.098,5.486 70.79,5.893 61.392,6.198 67.208,6.198 29.82,6.375 87.046,6.782 64.668,6.858 83.261,6.883 85.014,7.137 97.409,7.137 93.472,7.188 14.3,7.544 15.621,7.544 12.675,7.569 18.694,7.569 17.221,7.595 10.998,8.179 61.976,8.204 65.075,8.306 78.791,8.585 81.102,8.712 63.576,8.839 80.264,8.941 98.984,9.017 17.348,9.042 19.431,9.042 85.877,9.119 13.005,9.144 33.655,9.22 74.447,9.347 71.679,9.373 72.923,9.398 70.739,9.423 69.901,9.5 82.042,9.5 75.616,9.576 86.512,10.16 95.987,10.312 13.03,10.516 34.798,10.643 93.955,10.77 75.514,11.278 84.201,11.659 38.583,11.862 46.939,11.862 99.568,11.963 41.173,11.989 75.565,12.446 75.921,13.284 75.108,13.64 93.955,13.691 71.374,13.792 48.311,14.072 76.733,14.148 75.946,14.173 72.415,14.249 61.341,14.326 56.947,14.402 38.252,14.529 97.587,14.529 77.622,14.605 39.446,14.63 81.407,14.656 100.686,14.681 42.342,14.757 40.818,14.834 73.482,14.884 95.606,14.986 57.328,15.062 71.323,15.062 56.464,15.088 70.129,15.342 89.992,15.519 56.82,15.773 74.295,15.85 91.161,16.129 39.446,16.485 69.85,16.637 82.194,16.739 50.444,16.764 41.199,16.789 48.158,16.789 43.18,16.84 45.974,16.84 83.337,17.348 98.831,17.399 40.005,17.577 52.248,17.577 44.45,17.602 42.215,17.628 95.174,17.678 83.337,18.085 92.456,18.974 52.781,18.999 100.914,19.406 83.49,19.431 54.229,19.482 87.579,19.583 86.512,19.609 97.231,19.787 92.151,20.422 44.475,20.574 86.538,20.574 87.706,20.777 43.129,20.904 48.209,21.107 49.454,21.107 94.945,21.361 86.157,21.438 45.085,21.666 86.157,22.403 97.815,23.012 92.558,23.089 101.778,23.901 43.409,24.054 63.424,24.054 90.602,24.105 56.591,24.384 91.821,24.613 42.596,24.74 55.321,24.867 94.64,24.892 76.81,24.943 80.823,24.994 78.511,25.07 80.01,25.07 90.322,25.121 47.447,25.248 48.692,25.248 45.974,25.375 65.075,25.375 75.133,25.552 70.333,25.578 77.927,25.578 56.921,25.603 64.084,25.679 73.685,25.883 45.009,25.908 76.708,26.035 55.423,26.06 66.319,26.06 62.433,26.086 90.449,26.238 54,26.314 58.445,26.645 98.247,26.721 56.413,26.746 59.919,26.746 75.438,26.797 70.612,26.822 72.161,26.975 69.037,27.026 92.507,27.102 77.267,27.229 74.422,27.534 64.694,27.61 56.083,27.838 58.471,27.838 95.656,27.864 67.97,27.991 53.34,28.042 57.302,28.042 70.993,28.27 78.003,28.296 66.065,28.321 76.276,28.346 82.271,28.397 63.703,28.473 73.254,28.473 69.291,28.981 101.194,29.134 78.029,29.337 72.415,29.439 76.327,29.515 70.891,29.54 98.323,29.616 74.422,29.693 46.101,29.769 68.199,29.896 94.539,29.997 49.835,30.074 47.092,30.251 48.387,30.277 92.558,30.48 46.279,31.064 93.497,31.217 49.581,31.267 47.981,31.369 86.335,31.623 94.92,31.953 78.486,32.791 73.431,33.02 90.957,33.401 76.962,33.426 94.539,33.528 74.701,33.604 89.256,33.604 85.827,33.985 83.16,34.061 77.521,34.595 73.711,34.747 87.249,34.773 84.531,35.306 83.185,35.408 75.87,35.484 94.437,35.89 86.284,35.966 73.914,36.246 76.352,36.805 94.412,37.592 73.381,37.871 74.625,37.998 75.921,38.024 76.86,39.192 95.123,39.395 73.787,39.446 93.904,39.472 75.844,40.056 94.336,40.538 96.85,40.894 78.232,41.021 80.213,41.021 73.457,41.046 100.686,41.148 84.734,41.173 86.182,41.173 102.108,41.25 99.365,41.3 98.069,41.326 87.249,41.427 76.022,41.529 82.829,41.529 95.301,41.554 93.675,41.605
GND-ANT: CF7.2 CF8.2 DF1.1 GND-ANT.1 RB4.2 RF.3 RF.4 | length 39.9
  Top Layer w0.8: RB4.2@83.591,39.218 CF7.2@86.589,39.218
  Top Layer w1: CF7.2@86.589,39.218 88.189,39.218 89.84,40.869 RF.3@91.415,40.869 ; RF.4@91.415,62.869 94.736,62.869 DF1.1@95.402,63.535
  Bottom Layer w1: GND-ANT.1@89.51,40.919 91.364,40.919 RF.3@91.415,40.869
  Bottom Layer w1.5: RF.3@90.627,40.869 RF.3@92.188,40.869 ; RF.3@91.415,40.869 RF.4@91.415,62.869 v1@93.037,62.869
  other v1: 90.17,40.869 92.634,62.84 93.294,62.84
L: CX1.1 FP1.2 K1.2 K2.2 K3.2 L.1 NTC.1 RV1.1 | length 48.6
  Bottom Layer w2: K3.2@26.444,28.81 28.6,30.966 28.6,38.654 26.444,40.81 28.524,42.89 28.524,50.73 26.444,52.81 27.57,53.936 FP1.2@27.57,57.023 ; 27.57,55.46 FP1.2@27.57,57.023 ; CX1.1@32.229,67.462 30.115,65.349 RV1.1@30.115,61.874 30.827,61.163 NTC.1@30.827,57.035 30.814,57.023 FP1.2@27.57,57.023
LED1: LED1'.1 R10.2 U1.20 | length 5.9
  Top Layer w0.3: U1.20@85.145,21.304 85.145,18.499 R10.2@85.395,18.249 ; R10.2@85.471,18.249 86.829,18.249 v1(86.843,18.263)
  Bottom Layer w0.8: LED1'.1@85.522,18.263 v1(86.843,18.263)
LIGHT: JP4.1 K3.1 Light.1 | length 10.5
  Bottom Layer w2: JP4.1@15,23.952 21.618,23.952 K3.1@24.38,21.19
LIGHT-IO: Light-IO.1 R17.2 U1.2 | length 38.9
  Top Layer w0.3: R17.2@50.8,19.85 v1@51.707,20.757 ; v1@51.791,20.757 56.651,20.757 57.027,21.133 74.371,21.133 76.225,22.987 81.966,22.987 84.495,25.516 U1.2@84.495,26.854
  Bottom Layer w0.3: v1@51.791,20.599 v1(51.791,20.726)
  Bottom Layer w0.5: Light-IO.1@50.851,19.66 50.851,19.787 v1(51.791,20.726)
M-DN: JP3.2 K2.1 M-DN.1 | length 11.3
  Bottom Layer w2: JP3.2@15,38.952 18.142,38.952 K2.1@23.904,33.19
M-DN-IO: M-DN-IO.1 R15.2 U1.5 | length 37
  Top Layer w0.3: R15.2@50.8,22.353 51.436,21.717 v1(51.943,21.717) 74.172,21.717 75.996,23.541 81.682,23.541 82.545,24.404 U1.5@82.545,26.854
  Bottom Layer w0.5: M-DN-IO.1@50.775,22.377 51.435,21.717 v1(51.943,21.717)
M-UP: JP2.1 K1.1 M-UP.1 | length 9.4
  Bottom Layer w2: JP2.1@15,43.952 19.035,43.952 20.273,45.19 K1.1@23.904,45.19
M-UP-IO: M-UP-IO.1 R13.2 U1.6 | length 37.5
  Top Layer w0.3: R13.2@50.8,26.505 55.004,22.301 73.973,22.301 75.766,24.095 81.452,24.095 81.895,24.538 U1.6@81.895,26.854
  Bottom Layer w0.5: M-UP-IO.1@50.292,25.578 v1(51.74,25.578)
Net310V_1: 310V.1 BD1.1 CP1.1 CP2.1 RP1.2 RP3.2 T1.4 | length 25.7
  Top Layer w1: RP1.2@52.722,66.396 51.914,67.203 BD1.1@50.371,67.203 50.371,62.312 CP1.1@49.604,61.544 50.952,60.196 CP2.1@55.829,60.196 55.829,58.877 57.87,56.837 T1.4@59.73,56.837
  Bottom Layer w1: CP1.1@49.604,61.544 49.604,59.286 49.606,59.284
  Bottom Layer w1.5: 59.73,55.888 59.73,57.788
  other v1: 60.096,55.829 59.309,55.855 59.309,57.836 60.096,57.836 50.394,59.792 49.784,60.173 50.708,60.439
NetANT_1: ANT.1 DF1.2 RF.5 | length 10.5
  Top Layer w0.8: RF.5@91.415,65.409 94.729,65.409 DF1.2@95.402,64.735
  Bottom Layer w1.5: ANT.1@91.415,69.875 RF.5@91.415,65.409 v1@93.138,65.409
  other v1: 92.659,65.43 93.37,65.43
NetBD1_3: BD1.3 LS1.2 | length 5.7
  Top Layer w1: LS1.2@41.184,68.097 42.079,67.203 BD1.3@44.371,67.203
  Bottom Layer w1.5: 41.184,69.139 LS1.2@41.184,68.097 41.326,68.097 42.012,67.412
  other v1: 41.961,67.056 42.342,67.615